# Altium PCB ESP32_USB.PcbDoc (part 3 of 3)
Units mil, origin at the board's own origin, x right, y up, seen from the top; angles counter-clockwise.
Board outline 2700 x 1000 mil, 4 copper layers (L1, L2, L3, L4), stack 61.583 mil thick; 64 components, 73 nets, 299 pads, 163 vias.
Unrouted connection lines stored in the file: 1.
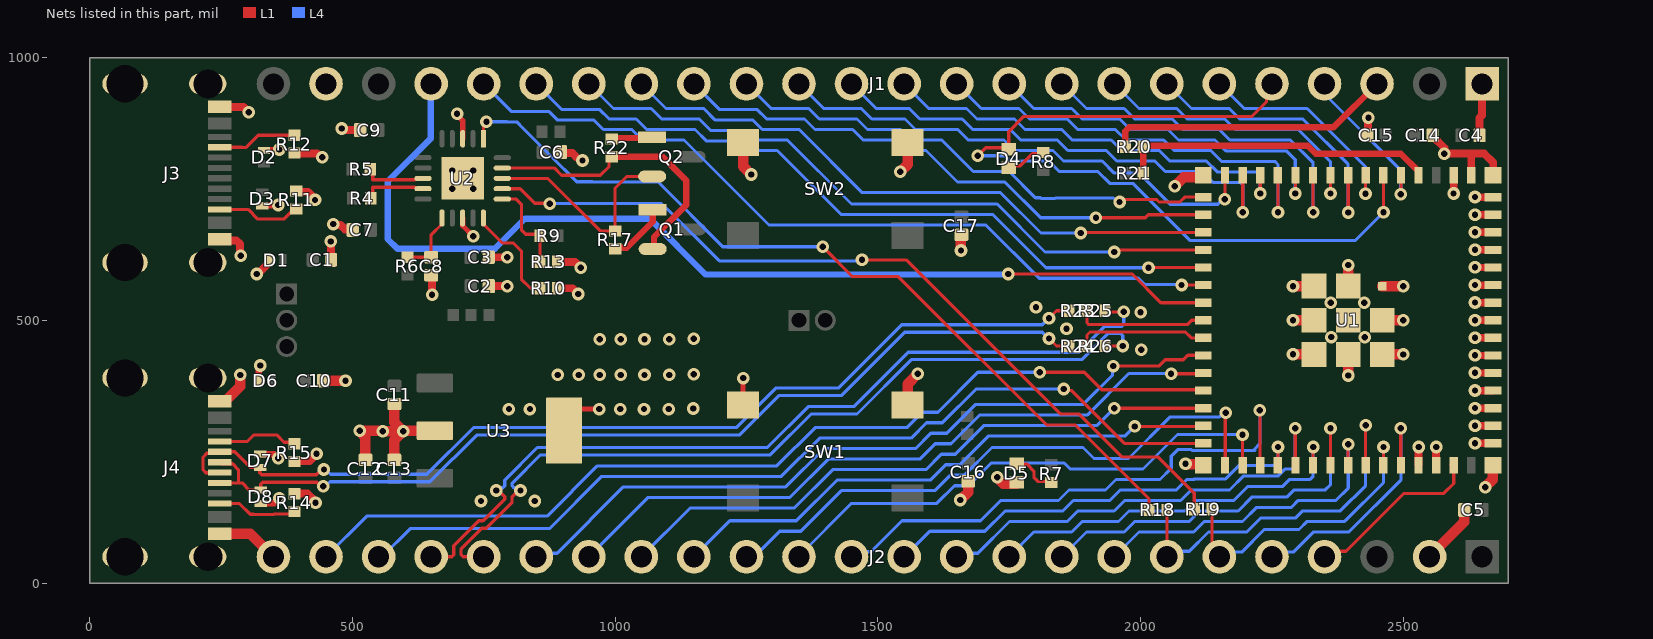
[diagram p4: the nets of this part, all layers, seen from the top]

## Via types
v1: diameter 24, hole 12, L1 to L4, tented both sides, 163 vias

## Nets (pads, with @x,y where several pads share a name; then routed paths per layer and width w, separated by ;. In a path a pad name is that pad's centre, name@x,y a point inside that pad or via, vN(x,y) a via of type N, cw(c..) or ccw(c..) an arc to the next point about the centre after c; other vN are vias at no path point) (continued)
CON2_USB_N: D7.2 J4.A7 J4.B7 R23.1 | length 1872.3
  L1 w6.23: J4.A7@247.64,210.24 247.4,210 221,210 215.89,215.11 215.89,239.6 223.1,246.82 244.85,246.82 J4.B7@247.64,249.61 276.39,249.61 306,220 D7.2@325,220 324,219 324,209.62 327.65,205.97 431.17,205.97 v1@443.98,218.79 ; v1(1825.69,503.69) 1840,518 R23.1@1863.97,518
  L4 w6.23: v1(446,216) 449.31,216 458.53,206.78 641.65,206.78 730.62,295.74 1230.62,295.74 1305.88,371 1424.88,371 1545.49,491.61 1813.15,491.61 1825.23,503.69 v1(1825.69,503.69)
CON2_USB_P: D8.2 J4.A6 J4.B6 R24.1 | length 1838
  L1 w6.23: J4.B6@247.64,190.55 282,190.55 ; J4.A6@247.64,229.92 250.43,227.13 272.18,227.13 283.33,215.98 283.33,191.88 282,190.55 ; v1(445,184) 440.21,184 432.47,191.74 329.65,191.74 326,188.1 D8.2@326,176.8 304.1,176.8 290.34,190.55 282,190.55 ; v1(1825.71,465.31) 1840.02,451 R24.1@1863.98,451
  L4 w6.23: v1(445,184) 448.99,184 457.53,192.55 647.55,192.55 736.51,281.51 1236.51,281.51 1311.77,356.77 1430.77,356.77 1551.39,477.39 1813.17,477.39 1825.25,465.31 v1(1825.71,465.31)
CON_ESP_USB_N: J2.21 R25.1 | length 1620.5
  L1 w6.03: J2.21@650,50 689.45,50 692.98,53.53 692.98,70.87 740.53,118.41 748.96,118.41 789.98,159.44 789.98,164.43 778.42,176 v1(774,176) ; R25.1@1932,518 1934,516 v1(1968,516)
  L4 w6.03: v1(774,176) 778.86,176 784.11,181.25 786.45,181.25 789.98,184.78 789.98,195.59 852.22,257.82 1289.64,257.82 1367.55,335.73 1454.56,335.73 1558.04,439.21 1882.37,439.21 1931.71,488.55 1964.47,488.55 1968,492.08 v1@1968,523.24
CON_ESP_USB_P: J2.20 R26.1 | length 1587.8
  L1 w6.03: J2.20@750,50 710.55,50 707.02,53.53 707.02,65.06 746.34,104.38 754.77,104.38 804.02,153.63 804.02,164.43 815.58,176 v1(820,176) ; R26.1@1932.02,451 v1(1966.02,451)
  L4 w6.03: v1(820,176) 815.14,176 809.89,181.25 807.55,181.25 804.02,184.78 804.02,189.78 858.03,243.79 1295.45,243.79 1373.36,321.7 1460.37,321.7 1563.85,425.18 1888.18,425.18 1937.52,474.52 1962.48,474.52 1966.02,470.99 v1(1966.02,451) ; v1@1965.39,441.59 v1@1965.39,448.09
CON_GPIO0: J1.3 R20.1 | length 546.2
  L1 w12: R20.1@1970.98,830 1970.98,859.81 1978.17,867 2367,867 J1.3@2450,950
DTR_FTDI: Q2.2 R17.1 U2.18 | length 417.2
  L1 w6: U2.18@785.41,770 785.64,769.77 871.82,769.77 971.57,670.02 R17.1@1000,670.02 1000,751.53 1022.07,773.6 Q2.2@1070.58,773.6
ESP_USB_N: R23.2 R25.2 U1.23 | length 249
  L1 w6.03: R23.2@1897.98,518 1897.98,495.31 1901.52,491.78 2088.78,491.78 2097,500 U1.23@2119.45,500
ESP_USB_P: R24.2 R26.2 U1.24 | length 256.3
  L1 w6.03: R26.2@1898,451 1898,472 1903.75,477.75 2085.25,477.75 2096.46,466.54 U1.24@2111.57,466.54 ; U1.24@2106.72,471.39 U1.24@2111.57,466.54 ; U1.24@2119.45,466.54 U1.24@2111.57,466.54
"FTDI RESET": C8.2 R6.2 U2.11 | length 128.1
  L1 w6: R6.2@605,620.02 C8.2@650,620 650,662.65 670.63,683.28 U2.11@670.63,694.59
FTDI_USB_N: R4.2 U2.9 | length 126.3
  L1 w6.23: R4.2@535.02,725.28 R4.2@535.02,732 538.67,735.65 538.67,753.04 619.21,753.04 621.93,750.32 U2.9@634.59,750.32
FTDI_USB_P: R5.2 U2.8 | length 122.7
  L1 w6.23: R5.2@534,787 R5.2@538.67,782.33 ; R5.2@541.51,779.49 R5.2@538.67,782.33 ; U2.8@634.59,770 621.93,770 619.21,767.27 538.67,767.27 R5.2@538.67,782.33
GND: C1.1 C2.1 C3.1 C4.1 C5.1 C6.1 C7.1 C8.1 C9.1 C10.1 C11.2 C12.1 C13.1 C14.1 C15.1 C16.1 C17.1 D1.1 D2.1 D3.1 D5.2 D6.1 D7.1 D8.1 J1.1 J1.23 J2.2 J2.24 J3.A1B12 J3.B1A12 J3.S1 J3.S2 J3.S3 J3.S4 J4.A1B12 J4.B1A12 J4.S1 J4.S2 J4.S3 J4.S4 R10.1 R11.1 R12.1 R13.1 R14.1 R15.1 SW1.3 SW1.4 SW2.3 SW2.4 U1.1 U1.2 U1.42 U1.43 U1.46 U1.47 U1.48 U1.49 U1.50 U1.51 U1.52 U1.53 U1.54 U1.55 U1.56 U1.57 U1.58 U1.59 U1.60 U1.61 U1.62 U1.63 U1.64 U1.65 U1.66 U1.67 U1.68 U1.69 U1.70 U1.71 U1.72 U1.73 U2.3 U2.13 U2.21 U3.2 U3.4 | length 3465.7
  L1 w10.01: v1(699.36,893.14) 699.36,890.91 710,880.28 U2.3@710,845.41 ; U2.13@710,694.59 710.23,694.35 710.23,679.77 v1(730,660) ; U3.4@903.03,290 U3.4@903.03,301.56 ; U3.4@932.48,331 v1(970,331) ; SW1.4@1243.5,338.58 1243.5,389.5 v1(1244,390)
  L1 w12: D6.1@322.2,385 322.2,411.2 v1(325,414) ; D7.1@325,245.59 325.59,245 351.35,245 v1(358.8,237.54) ; D8.1@326,151.2 326.89,152.09 351.63,152.09 v1(360.66,161.13) ; D3.1@329,718 329.7,718.7 358.02,718.7 v1(358.73,719.41) ; D2.1@332,823 332.89,823.89 359.89,823.89 v1(361,825)
  L1 w14: v1@2595.83,741.5 U1.2@2595.83,775.59 ; v1@2636.54,265.75 U1.46@2670.63,265.75 ; v1@2636.54,299.21 U1.47@2670.63,299.21 ; v1@2636.54,332.68 U1.48@2670.63,332.68 ; v1@2636.54,366.14 U1.49@2670.63,366.14 ; v1@2636.54,399.61 U1.50@2670.63,399.61 ; v1@2636.54,433.07 U1.51@2670.63,433.07 ; v1@2636.54,466.54 U1.52@2670.63,466.54 ; v1@2636.54,500 U1.53@2670.63,500 ; v1@2636.54,533.46 U1.54@2670.63,533.46 ; v1@2636.54,566.93 U1.55@2670.63,566.93 ; v1@2636.54,600.39 U1.56@2670.63,600.39 ; v1@2636.54,633.86 U1.57@2670.63,633.86 ; v1@2636.54,667.32 U1.58@2670.63,667.32 ; v1@2636.54,700.79 U1.59@2670.63,700.79 ; v1@2636.54,734.25 U1.60@2670.63,734.25
  L1 w15: J3.B1A12@247.64,653.94 249.57,652 279.21,652 286.28,644.94 286.28,624.72 v1(288,623) ; J3.A1B12@247.64,905.91 293.09,905.91 v1(303,896) ; v1(318,588) 320.11,588 342.41,610.3 D1.1@342.41,614 ; R14.1@390,170 415.03,170 430,155.03 v1(430,153) ; R15.1@390,230.98 390.7,231.69 418.71,231.69 432,244.97 v1(432,246) ; R11.1@393,746.02 394.97,744.04 415.71,744.04 429,730.76 v1(429,729) ; 404.21,817.39 433.18,817.39 440.56,810 v1(443,810) ; v1(459,650) 459.2,649.8 459.2,615.2 C1.1@459.41,615 ; v1(464,683) 465.72,681.28 477.72,681.28 486,673 499.8,673 C7.1@500.8,672 ; v1(480,865) 483,862 C9.1@514.8,862 ; C8.1@650,585.59 651.78,583.81 v1(651.78,548.39) ; C3.1@759.41,620 v1(795,620) ; C2.1@760,565 v1(795,565) ; R10.1@891.01,561 919,561 v1(930,550) ; R13.1@891.01,611 924,611 v1(935,600) ; C6.1@897.2,820 899.2,818 919,818 926,811 ; C15.1@2431.59,852 2432.57,852.98 2432.57,884.4 v1(2433.54,885.38) ; U1.42@2528.9,224.41 v1@2528.9,258.5 ; C14.1@2555.41,852 2555.41,850.62 2578,828.03 v1(2578,817) 2630,817 ; U1.43@2562.36,224.41 v1@2562.36,258.5 ; U1.1@2629.29,775.59 2629.29,816.29 2630,817 ; C4.1@2645,852 2645,885 2650,890 J1.1@2650,950 ; U1.62@2670.63,775.59 2671,775.96 2671,800 2654,817 2630,817
  L1 w20: J4.B1A12@247.64,94.09 305.91,94.09 J2.24@350,50 ; J4.A1B12@247.64,346.06 258.46,346.06 287,374.6 v1(287,396) ; C10.1@444.41,385 v1(487,385) ; C12.1@525,234.41 525,277.92 514,288.92 v1(514,290) 514.5,289.5 557.5,289.5 v1(558,289) v1(597,289) ; C13.1@580,234.41 580,272 v1(597,289) ; C11.2@580,340.59 580,306 v1(597,289) ; U3.2@656.97,290 656.47,289.5 597.5,289.5 v1(597,289) ; SW2.4@1243.5,838.58 1243.5,792.82 v1(1259.06,777.27) ; v1(1542.61,782.46) 1557.38,797.23 SW2.3@1557.38,837.7 ; SW1.3@1556.5,338.58 1556.5,378.5 v1(1576,398) ; v1(1657,158) 1672,173 C16.1@1672,193.59 ; v1(1658.26,632.71) C17.1@1658.26,662.59 ; v1@1727,202 v1(1727,201.36) 1727,200.72 1738.72,189 1763.63,189 D5.2@1764,188.63 ; v1(2064.99,755.15) 2081.99,772.15 2116.01,772.15 U1.63@2119.45,775.59 ; v1(2085.42,226.88) 2086.71,225.59 2118.27,225.59 U1.64@2119.45,224.41 ; v1(2290,435.08) U1.73@2330.06,435.06 ; v1(2290,500.04) U1.72@2330.08,500 ; v1(2290,565) U1.71@2330.08,564.96 ; v1(2395,394.96) U1.70@2395.04,435.04 ; U1.69@2395.06,564.98 v1(2395.08,605.04) ; U1.68@2460,435.04 v1(2500.08,435) ; U1.67@2460,500 v1(2500.08,499.96) ; U1.66@2460.02,564.94 v1(2500.08,564.92) ; J2.2@2550,50 2550,51 2616,117 C5.1@2616,139 ; v1(2656,182) 2656,183 2670,197 2670,223.78 U1.65@2670.63,224.41
  other v1: 745,156 847,156 2529.15,258.75 2562.61,258.75 2636.29,266 2636.29,299.46 798,331 838,331 1010,331 1055,331 1102,331 1149,332 2636.29,332.93 2636.29,366.39 891,396 931,396 971,396 1011,396 1056,396 1103,396 1150,397 2636.29,399.86 2636.29,433.32 2001,444 971,464 1011,464 1056,464 1103,464 1150,465 2636.29,466.79 2362.98,468.02 2426.6,467.89 1859,484 2636.29,500.25 2000,515 1801,525 2362.02,533.25 2425.64,533.12 2636.29,533.72 2636.29,567.18 2636.29,600.65 2636.29,634.11 2636.29,667.57 2636.29,701.04 2636.29,734.5 2595.57,741.25 690,750 730,750 690,785 730,785 938,804
GPIO0: R20.2 R21.2 U1.4 | length 603.5
  L1 w12: R21.2@2005,780 2005,831.18 2005.9,832.08 2318.34,832.08 2333.42,817 2495.36,817 2528.9,783.46 U1.4@2528.9,775.59
GPIO1: J1.4 U1.5 | length 305.8
  L1 w6: v1(2495,740) 2495.22,740.22 2495.22,775.37 U1.5@2495.43,775.59
  L4 w6: J1.4@2350,950 2360.33,939.67 2360.33,920.19 2495,785.52 v1(2495,740)
GPIO2: D4.2 J1.5 U1.6 | length 1580.2
  L1 w6: v1(1690,813) 1705.37,828.37 1749,828.37 1749,859 1778,888 2212,888 2239.67,915.67 2239.67,939.67 J1.5@2250,950 ; v1(2462.18,705.25) U1.6@2462.22,775.84
  L4 w6: v1(1690,813) 1741.72,813 1751.72,803 1825.15,803 1845.15,783 1918.43,783 1940.97,760.46 1985.4,760.46 2093.86,652 2408.93,652 v1(2462.18,705.25)
GPIO3: J1.6 U1.7 | length 429.2
  L1 w6: v1(2428,741) 2428.25,741.25 2428.25,775.34 U1.7@2428.5,775.59
  L4 w6: J1.6@2150,950 2197,903 2317,903 2428,792 v1(2428,741)
GPIO4: J1.7 U1.8 | length 570.8
  L1 w6: v1(2395,705) v1(2395,705) U1.8@2395.04,775.59
  L4 w6: J1.7@2050,950 2097,903 2168.72,903 2188.72,883 2308.72,883 2395,796.72 v1(2395,705)
GPIO5: J1.8 U1.9 | length 567.3
  L1 w6: v1@2361.57,741.5 U1.9@2361.57,775.59
  L4 w6: J1.8@1950,950 1997,903 2068.72,903 2088.72,883 2160.43,883 2180.43,863 2300,863 2361.32,801.68 v1(2361.32,741.25)
GPIO6: J1.9 U1.10 | length 705.6
  L1 w6: v1@2328.36,705.29 U1.10@2328.36,775.84
  L4 w6: J1.9@1850,950 1897,903 1968.72,903 1988.72,883 2060.43,883 2080.43,863 2150,863 2170,843 2285,843 2328.32,799.68 v1(2328.32,705.25)
GPIO7: J1.10 U1.11 | length 702.5
  L1 w6: v1@2294.65,741.5 U1.11@2294.65,775.59
  L4 w6: J1.10@1750,950 1797,903 1868.72,903 1888.72,883 1960.43,883 1980.43,863 2052.15,863 2072.15,843 2141.72,843 2162.36,822.36 2277.36,822.36 2294.39,805.32 v1(2294.39,741.25)
GPIO8: J1.11 U1.12 | length 836.8
  L1 w6: v1(2261.39,705.25) U1.12@2261.43,775.84
  L4 w6: J1.11@1650,950 1697,903 1768.72,903 1788.72,883 1860.43,883 1880.43,863 1952.15,863 1972.15,843 2043.86,843 2063.86,823 2133.43,823 2154.07,802.36 2255.54,802.36 2261.39,796.5 v1(2261.39,705.25)
GPIO9: J1.12 U1.13 | length 818.7
  L1 w6: v1@2227.72,741.5 U1.13@2227.72,775.59
  L4 w6: J1.12@1550,950 1597,903 1668.72,903 1688.72,883 1760,883 1780,863 1850,863 1870,843 1943.86,843 1963.86,823 2035.58,823 2055.58,803 2125.15,803 2145.79,782.36 2221.61,782.36 2227.46,776.5 v1(2227.46,741.25)
GPIO10: J1.13 U1.14 | length 948.9
  L1 w6: v1(2194.46,705.25) U1.14@2194.5,775.84
  L4 w6: J1.13@1450,950 1497,903 1560,903 1580,883 1660.43,883 1680.43,863 1751.72,863 1771.72,843 1841.72,843 1861.72,823 1935,823 1955,803 2027.29,803 2047.29,783 2116.86,783 2137.51,762.36 2189.14,762.36 2195,756.5 2195,705.79 v1(2194.46,705.25) v1@2192.78,705.25
GPIO11: J1.14 U1.15 | length 942.9
  L1 w6: v1@2160.79,741.5 U1.15@2160.79,775.59
  L4 w6: J1.14@1350,950 1397,903 1468.72,903 1488.72,883 1551.72,883 1571.72,863 1652.15,863 1672.15,843 1740,843 1760,823 1833.43,823 1853.43,803 1926.72,803 1949.26,780.46 1996.62,780.46 2056.3,720.78 2147.14,720.78 2156.36,730 v1(2160,730)
GPIO12: J1.15 U1.16 | length 971.2
  L1 w6: v1(1960,725) 1965,730 2030,730 2035,725 2074.72,725 2083.98,734.25 U1.16@2119.45,734.25
  L4 w6: J1.15@1250,950 1297,903 1368.72,903 1388.72,883 1460.43,883 1480.43,863 1543.43,863 1563.43,843 1621.82,843 1681.82,783 1750.09,783 1799.92,733.17 1809.43,733.17 1810.58,732.02 1837.45,732.02 1838.12,732.7 1948.51,732.7 1956.21,725 v1(1960,725)
GPIO13: J1.16 U1.17 | length 1077.5
  L1 w6: v1(1915,695) 2008.96,695 2014.74,700.79 U1.17@2119.45,700.79
  L4 w6: J1.16@1150,950 1199.14,900.86 1270.86,900.86 1288.72,883 1360.43,883 1380.43,863 1452.15,863 1472.15,843 1535.15,843 1555.15,823 1591.64,823 1651.64,763 1741.8,763 1809.8,695 v1(1915,695)
GPIO14: J1.17 U1.18 | length 1187.6
  L1 w6: v1(1885.96,666.04) 1887.25,667.32 U1.18@2119.45,667.32
  L4 w6: J1.17@1050,950 1097,903 1168.72,903 1190.86,880.86 1262.57,880.86 1280.43,863 1350.38,863 1470.38,743 1733.52,743 1810.48,666.04 v1(1885.96,666.04)
GPIO15: J1.18 U1.19 | length 1303.6
  L1 w6: v1(1950,630) 1953.86,633.86 U1.19@2119.45,633.86
  L4 w6: J1.18@950,950 997,903 1068.72,903 1088.72,883 1160.43,883 1182.57,860.86 1254.29,860.86 1272.15,843 1328.01,843 1449.81,721.19 1727.04,721.19 1818.24,630 v1(1950,630)
GPIO16: J1.19 U1.20 | length 1414.6
  L1 w6: v1(2015,600) 2015.39,600.39 U1.20@2119.45,600.39
  L4 w6: J1.19@850,950 899.14,900.86 970.86,900.86 988.72,883 1040,883 1060,863 1152.15,863 1174.29,840.86 1246.01,840.86 1263.86,823 1308.28,823 1430.09,701.19 1718.76,701.19 1819.95,600 v1(2015,600)
GPIO17: J1.20 U1.21 | length 1528.1
  L1 w6: v1(2078,567) v1(2078,567) 2119.41,566.96 U1.21@2119.45,566.93
  L4 w6: J1.20@750,950 802.51,897.49 851.46,897.49 851.86,897.09 874.62,897.09 890.86,880.86 960,880.86 977.86,863 1031.72,863 1051.72,843 1131.16,843 1292.97,681.19 1705.69,681.19 1806.88,580 1996,580 2008.02,567.98 2077.02,567.98 v1(2078,567)
GPIO18: J1.21 U1.22 | length 1987.2
  L1 w6: v1(1748,588) 1984.07,588 2038.61,533.46 U1.22@2119.45,533.46
  L4 w12: J1.21@650,950 649.13,949.13 649.13,845.94 567.45,764.26 567.45,654.49 585.94,636 771.4,636 828.47,693.07 877,693.07 ; 869,693.07 877,693.07 ; v1@1747.68,586.96 1172.5,586.96 1066.39,693.07 877,693.07
GPIO21: J2.19 U1.25 | length 1437.1
  L1 w6: v1(1947.92,412.82) 2034.63,412.82 2046.82,425 2081.49,425 2090.06,433.56 U1.25@2118.96,433.56
  L4 w6: J2.19@850,50 856.77,56.77 889.7,56.77 1015.81,182.88 1324.55,182.88 1397.5,255.83 1571.72,255.83 1600.89,285 1631.04,285 1686.06,340.02 1890.88,340.02 1946.71,395.85 1946.71,411.6 v1(1947.92,412.82)
GPIO26: J2.18 U1.26 | length 1321.4
  L1 w6: v1@2057.35,398.65 2057.7,398.3 2118.15,398.3 U1.26@2119.45,399.61
  L4 w6: J2.18@950,50 1062.88,162.88 1332.84,162.88 1405.78,235.83 1580,235.83 1609.17,265 1639.32,265 1694.34,320.02 1899.16,320.02 1977.81,398.67 v1@2064.18,398.67
  other v1: 2058,398
GPIO33: J2.17 U1.28 | length 1186.9
  L1 w6: v1@1950,333 1950.32,332.68 U1.28@2119.45,332.68
  L4 w6: J2.17@1050,50 1142.88,142.88 1341.12,142.88 1414.06,215.83 1591.79,215.83 1620.96,245 1647.61,245 1702.63,300.02 1917.34,300.02 v1(1950.16,332.84)
GPIO34: J2.16 U1.29 | length 1072.7
  L1 w6: v1(1988.87,298.03) 2118.27,298.03 U1.29@2119.45,299.21
  L4 w6: J2.16@1150,50 1218.42,118.42 1344.94,118.42 1422.35,195.83 1600.07,195.83 1629.25,225 1655.89,225 1710.91,280.02 1970.86,280.02 v1(1988.87,298.03)
GPIO35: J2.15 U1.31 | length 1144.1
  L1 w6: U1.31@2161.01,224.64 2161.01,323.01 v1@2163,325
  L4 w6: J2.15@1250,50 1264.61,50 1313.03,98.42 1353.23,98.42 1430.63,175.83 1608.36,175.83 1637.53,205 1664.17,205 1717.17,258 1890.47,258 1911.47,237 1977,237 2056.22,316.22 2150.43,316.22 2158.22,324.01 v1(2162.01,324.01)
GPIO36: J2.14 U1.32 | length 1013.5
  L1 w6: U1.32@2194.25,224.41 v1@2194.25,287.93
  L4 w6: J2.14@1350,50 1350,51.47 1449.98,151.46 1612.27,151.46 1645.82,185 1672.46,185 1715.82,228.36 1854.5,228.36 1865.85,217 2004.53,217 2070.21,282.67 v1@2193.33,282.67
  other v1: 2194,282
GPIO37: J2.13 U1.33 | length 1050.5
  L1 w6: v1@2227,330.91 2227,225.12 U1.33@2227.72,224.41
  L4 w6: J2.13@1450,50 1459.47,59.47 1487,59.47 1546.02,118.49 1695.45,118.49 1733.96,157 1843.86,157 1863.86,177 1933.15,177 1953.15,197 2037,197 2058.42,218.42 2058.42,241.51 2070.71,253.79 2074.15,253.79 2074.24,253.88 2096.61,253.88 2096.69,253.79 ; 2098,252 2217.24,252 ; 2215.93,253.79 2227,264.86 v1(2227,329)
GPIO38: J2.12 U1.34 | length 848
  L1 w6: U1.34@2261.18,224.41 v1@2261.18,258.5
  L4 w6: J2.12@1550,50 1550.64,50 1599.13,98.49 1703.74,98.49 1742.25,137 1852.15,137 1872.15,157 1941.43,157 1961.43,177 2067.84,177 2087.84,197 2102,197 2103.09,198.09 2161.91,198.09 2187.77,223.95 2253.95,223.95 2261.43,231.43 v1(2261.43,258.75)
GPIO39: J2.11 U1.35 | length 858.3
  L1 w6: U1.35@2294.39,224.16 v1(2294.43,294.75)
  L4 w6: J2.11@1650,50 1656.62,56.62 1690.15,56.62 1750.53,117 1860.43,117 1880.43,137 1949.72,137 1969.72,157 2076.12,157 2096.12,177 2169.11,177 2196.06,203.95 2262.23,203.95 2275.5,217.22 2288.58,217.22 2294.43,223.08 v1(2294.43,294.75)
GPIO40: J2.10 U1.36 | length 731.5
  L1 w6: U1.36@2328.11,224.41 v1@2328.11,258.5
  L4 w6: J2.10@1750,50 1797,97 1868.72,97 1888.72,117 1958,117 1978,137 2084.4,137 2104.4,157 2177.4,157 2204.34,183.95 2270.52,183.95 2283.79,197.22 2322.5,197.22 2328.36,203.08 v1(2328.36,258.75)
GPIO41: J2.9 U1.37 | length 746.4
  L1 w6: U1.37@2361.32,224.16 v1@2361.32,294.71
  L4 w6: J2.9@1850,50 1897,97 1968.72,97 1988.72,117 2092.69,117 2112.69,137 2185.68,137 2212.63,163.95 2278.8,163.95 2292.07,177.22 2351.53,177.22 2361.36,187.05 v1(2361.36,294.75)
GPIO42: J2.8 U1.38 | length 617.1
  L1 w6: U1.38@2395,230 v1@2395,264.09
  L4 w6: J2.8@1950,50 1997,97 2100.97,97 2120.97,117 2193.96,117 2220.91,143.95 2287.09,143.95 2300.36,157.22 2371.79,157.22 2395.25,180.68 v1(2395.25,264.34)
GPIO45: J2.5 U1.41 | length 475.1
  L1 w6: U1.41@2495.18,224.16 v1(2495.22,294.75)
  L4 w6: J2.5@2250,50 2259.24,59.24 2291.4,59.24 2329.38,97.22 2396.64,97.22 2495.22,195.8 v1(2495.22,294.75)
GPIO46: J2.4 U1.44 | length 339.1
  L1 w6: J2.4@2350,50 2360.33,60.33 2391,60.33 2501.28,170.61 2576.96,170.61 2595.83,189.47 U1.44@2595.83,224.41
  L1 w15: U1.44@2595.45,224.04 U1.44@2595.83,224.41
GPIO47: J2.23 U1.27 | length 1829.3
  L1 w6: v1(1808,401) 1893,401 1926.1,367.9 2117.69,367.9 U1.27@2119.45,366.14
  L4 w6: J2.23@450,50 527.28,127.28 870.72,127.28 966.31,222.88 1307.98,222.88 1380.93,295.83 1555.15,295.83 1584.32,325 1614.47,325 1690.47,401 v1(1808,401)
GPIO48: J2.22 U1.30 | length 1744.6
  L1 w6: v1(1853.85,369.25) 1856.53,366.57 1868.43,366.57 1969.25,265.75 U1.30@2119.45,265.75
  L4 w6: J2.22@550,50 556.41,50 610,103.59 875.31,103.59 974.6,202.88 1316.27,202.88 1389.21,275.83 1563.43,275.83 1592.61,305 1622.75,305 1687,369.25 v1(1853.85,369.25)
NetD4_1: D4.1 R8.1 | length 78.4
  L1 w6: D4.1@1749,789 1753.89,793.89 1770.94,793.89 1794.05,817 1813,817 R8.1@1815,819
NetD5_1: D5.1 R7.1 | length 87.9
  L1 w6: D5.1@1764,227.02 1765.02,226 1784,226 1797,213 1797,201 1805,193 1828,193 R7.1@1830,191
NetJ3_A5: J3.A5 R12.2 | length 158.9
  L1 w6: J3.A5@248.54,830.04 J3.A5@247.64,829.13 289.87,829.13 290,829 298,829 321.01,852.01 R12.2@390,852.01 R12.2@386.01,856
NetJ3_B5: J3.B5 R11.2 | length 161.2
  L1 w6: J3.B5@247.66,711 293,711 301.74,711 320.33,692.41 369.91,692.41 383.87,706.37 387.37,706.37 R11.2@393,712
NetJ4_A5: J4.A5 R15.2 | length 154.7
  L1 w6: J4.A5@247.64,269.29 300.29,269.29 313,282 356,282 370,268 387,268 R15.2@390,265
NetJ4_B5: J4.B5 R14.2 | length 153.4
  L1 w6: J4.B5@247.64,151.18 285.28,151.18 305.46,131 312,131 312.8,130.2 350.17,130.2 351.06,131.09 385.11,131.09 R14.2@390,135.98
NetQ1_1: Q1.1 R17.2 | length 115.8
  L1 w12: R17.2@1000,636 1002,638 1022,638 1071.58,687.58 Q1.1@1071.58,710.4
NetQ2_1: Q2.1 R22.2 | length 78
  L1 w12: R22.2@994,845.01 995.7,846.7 1068.88,846.7 Q2.1@1070.58,848.4
NetR10_2: R10.2 U2.15 | length 200.9
  L1 w6: U2.15@749.37,694.59 749.37,683.28 785.65,647 806.18,647 822,631.18 822,608.82 821.79,608.61 821.79,578.21 839,561 R10.2@856.99,561
RTS_FTDI: Q1.2 R22.1 U2.19 | length 542
  L1 w6: U2.19@796.94,789.91 797.4,789.91 797.47,789.99 825,789.99 884.07,789.99 898.18,775.87 971.96,775.87 988.71,792.62 988.71,805.71 R22.1@994,810.99
  L1 w12: R22.1@994,810.99 1090.29,810.99 1135.41,765.87 1135.41,719.28 1073.95,657.83 1073.95,637.98 Q1.2@1071.58,635.6
RXD_FTDI: R18.2 U2.1 | length 1601.9
  L1 w6: U2.1@749.35,856.94 749.35,871.63 v1(755.2,877.49) ; v1(1395,640) 1451.91,583.09 1538.63,583.09 1820.86,300.86 1875.3,300.86 2015.98,160.17 R18.2@2015.98,139
  L4 w6: v1@755.53,877.81 793.9,877.81 794.23,877.49 813.11,877.49 825.6,865 877,813.6 927.09,763.51 957.16,763.51 957.67,763 1082,763 1205,640 v1(1395,640)
TXD_FTDI: R19.2 U2.17 | length 1590.4
  L1 w6: U2.17@785.41,750.32 819.29,750.32 846.98,722.63 v1@877.53,722.63 ; v1(1470,615) 1553.88,615 1846.94,321.94 1882.5,321.94 1964.44,240 2032.85,240 2101.99,170.86 R19.2@2101.99,140
  L4 w6: v1(876,722) 1088.16,722 1098.32,711.84 1099.65,711.84 1198.49,613 1468,613 v1(1470,615)
U0RXD: J2.6 R19.1 U1.40 | length 568.2
  L1 w6: R19.1@2136.01,140 2136.01,78.6 2150,64.61 J2.6@2150,50 ; U1.40@2461.97,224.41 v1@2461.97,258.5
  L4 w6: J2.6@2150,50 2158.86,58.86 2192.39,58.86 2235.28,101.74 2301.45,101.74 2316.93,117.22 2388.36,117.22 2462.22,191.08 v1(2462.22,258.75)
U0TXD: J2.7 R18.1 U1.39 | length 708.8
  L1 w6: J2.7@2050,50 R18.1@2050,139 ; U1.39@2428.21,229.75 v1@2428.21,300.3
  L4 w6: J2.7@2050,50 2060.33,60.33 2092.59,60.33 2129.26,97 2202.25,97 2229.19,123.95 2295.37,123.95 2308.64,137.22 2380.07,137.22 2428.25,185.4 v1(2428.25,300.34)
VBUS_SENSE: R9.1 R13.2 U2.16 | length 179
  L1 w6: U2.16@785.41,730.63 812.08,730.63 821.76,720.95 821.76,672.1 830.15,663.71 854.28,663.71 R9.1@856.99,661 R13.2@856.99,611
pads on no net: J1.24 J3.A8 J3.B8 J4.A8 J4.B8 U2.2 U2.4 U2.5 U2.6 U2.7 U2.14

## Polygon pours and split planes (outlines as drawn)
GND on L1 "GND_L01_P001" (solid, pour order 1): 1168.73,492 943,492 772,336 729,336 608,336 592,352 517,352 498,333 498,223 608,223 609,222 630,243 630,244 807,244 850,201 1151,201 1169,219 1169,483 1169,485
+5V_VBUS2 on L1 "+5V_VBUS2_L01_P005" (solid, pour order 5): 350,469 351,468 351,402 341,402 340,401 340,305 355,305 421,371 421,440 391,470 351,470
+5V_VBUS1 on L1 "+5V_VBUS1_L01_P004" (solid, pour order 4): 352,531 352,580 355,613 355,671 399,671 438,632 437,631 437,531 353,531
+5V on L1 "+5V_L01_P003" (solid, pour order 3): 351,499 352,500 352,522 453,522 574,401 697,401 697,360 694,360 560,360 560,368 450,478 352,478 350,480 351,481
+3.3V_REG on L1 "+3.3V_REG_L01_P002" (solid, pour order 2): 468,176 485,176 492,183 492,214 613,214 619,220 694,220 695,219 695,178 628,178 597,147 468,147 468,151
GND on L1 "GND_L01_P000" (solid, pour order 0): 2307.78,626 2526,626 2526,376 2267,376 2267,626
GND on L2 "GND_L02_P008" (solid, pour order 8): 2682.75,18.08 2683,18.33 2683,985 18,985 19,984 19,19 2682.01,19 2683,18.01
+3.3V_REG on L2 "+3.3V_REG_L02_P007" (solid, pour order 7): 462.33,163.15 462.33,172.33 490,200 644,200 644,140 462,140 462,172
+3V3 on L2 "+3V3_L02_P006" (solid, pour order 6): 2683,18.01 2683,985 1015,985 1015,822 1020,817 1047,817 1183,681 1265,681 1265,664 1379,550 1379,481 1425,481 1425,579 1413,588 1340,661 1341,662 1341,686 1636,686 1639,683 1684,728 1903,728 1904,727 1966,789 2510,789 2516,789 2534,775 2534,690 2581,643 2581,155 2522,96 2315,96 2315,33 2332,16
GND on L3 (split plane): 2699.95,0.05 0.05,0.05 0.05,999.95 2699.95,999.95

## Silkscreen, mask and mechanical layers (free items; w line width, h text height)
Top Overlay:
  text "J1" at 2264,849 h40
  text "USER" at 1712,708 h30
  text "BOOT/USER" at 1269,580 h30
  text "USB1" at 435,539 h30
  text "UART" at 43,515 h40
  text "+5V" at 441,487 h30
  text "3V3" at 1459,480 h30
  text "REG" at 1215,477 h30
  text "ESP" at 53,435 h40
  text "USB2" at 437,433 h30
  text "RESET" at 1336,388 h30
  text "PWR" at 1727,278 h30
  text "J2" at 2326,123 h40
Bottom Overlay:
  drawing of 73 lines, arcs and shapes, not listed
  text "NC" at 368,861 h35 r90
  text "GND" at 468,861 h35 r90
  text "5V" at 568,861 h35 r90
  text "IO18" at 668,861 h35 r90
  text "IO17" at 768,861 h35 r90
  text "IO16" at 868,861 h35 r90
  text "IO15" at 968,861 h35 r90
  text "IO14" at 1068,861 h35 r90
  text "IO13" at 1168,861 h35 r90
  text "IO12" at 1268,861 h35 r90
  text "IO11" at 1368,861 h35 r90
  text "IO10" at 1468,861 h35 r90
  text "IO9" at 1568,861 h35 r90
  text "IO8" at 1668,861 h35 r90
  text "IO7" at 1768,861 h35 r90
  text "IO6" at 1868,861 h35 r90
  text "IO5" at 1968,861 h35 r90
  text "IO4" at 2068,861 h35 r90
  text "IO3" at 2168,861 h35 r90
  text "IO2" at 2268,861 h35 r90
  text "IO1" at 2368,861 h35 r90
  text "IO0" at 2468,861 h35 r90
  text "3V3" at 2568,861 h35 r90
  text "GND" at 2668,861 h35 r90
  text "GND" at 373,252 h35 r90
  text "IO47" at 473,252 h35 r90
  text "IO48" at 573,252 h35 r90
  text "USB-" at 673,252 h35 r90
  text "USB+" at 773,252 h35 r90
  text "IO21" at 873,252 h35 r90
  text "IO26" at 973,252 h35 r90
  text "IO33" at 1073,252 h35 r90
  text "IO34" at 1173,252 h35 r90
  text "IO35" at 1273,252 h35 r90
  text "IO36" at 1373,252 h35 r90
  text "IO37" at 1473,252 h35 r90
  text "IO38" at 1573,252 h35 r90
  text "IO39" at 1673,252 h35 r90
  text "IO40" at 1773,252 h35 r90
  text "IO41" at 1873,252 h35 r90
  text "IO42" at 1973,252 h35 r90
  text "TXD" at 2073,252 h35 r90
  text "RXD" at 2173,252 h35 r90
  text "IO45" at 2273,252 h35 r90
  text "IO46" at 2373,252 h35 r90
  text "EN" at 2473,252 h35 r90
  text "GND" at 2573,252 h35 r90
  text "3V3" at 2673,252 h35 r90
Board Shape:
  the board outline again, w20

## Text inside footprints (layer, text, board x,y; h text height)
J6: Top Overlay "1" at 305,529 h40